# EAGLE board untitled (EAGLE 9.4.2), part 1 of 2
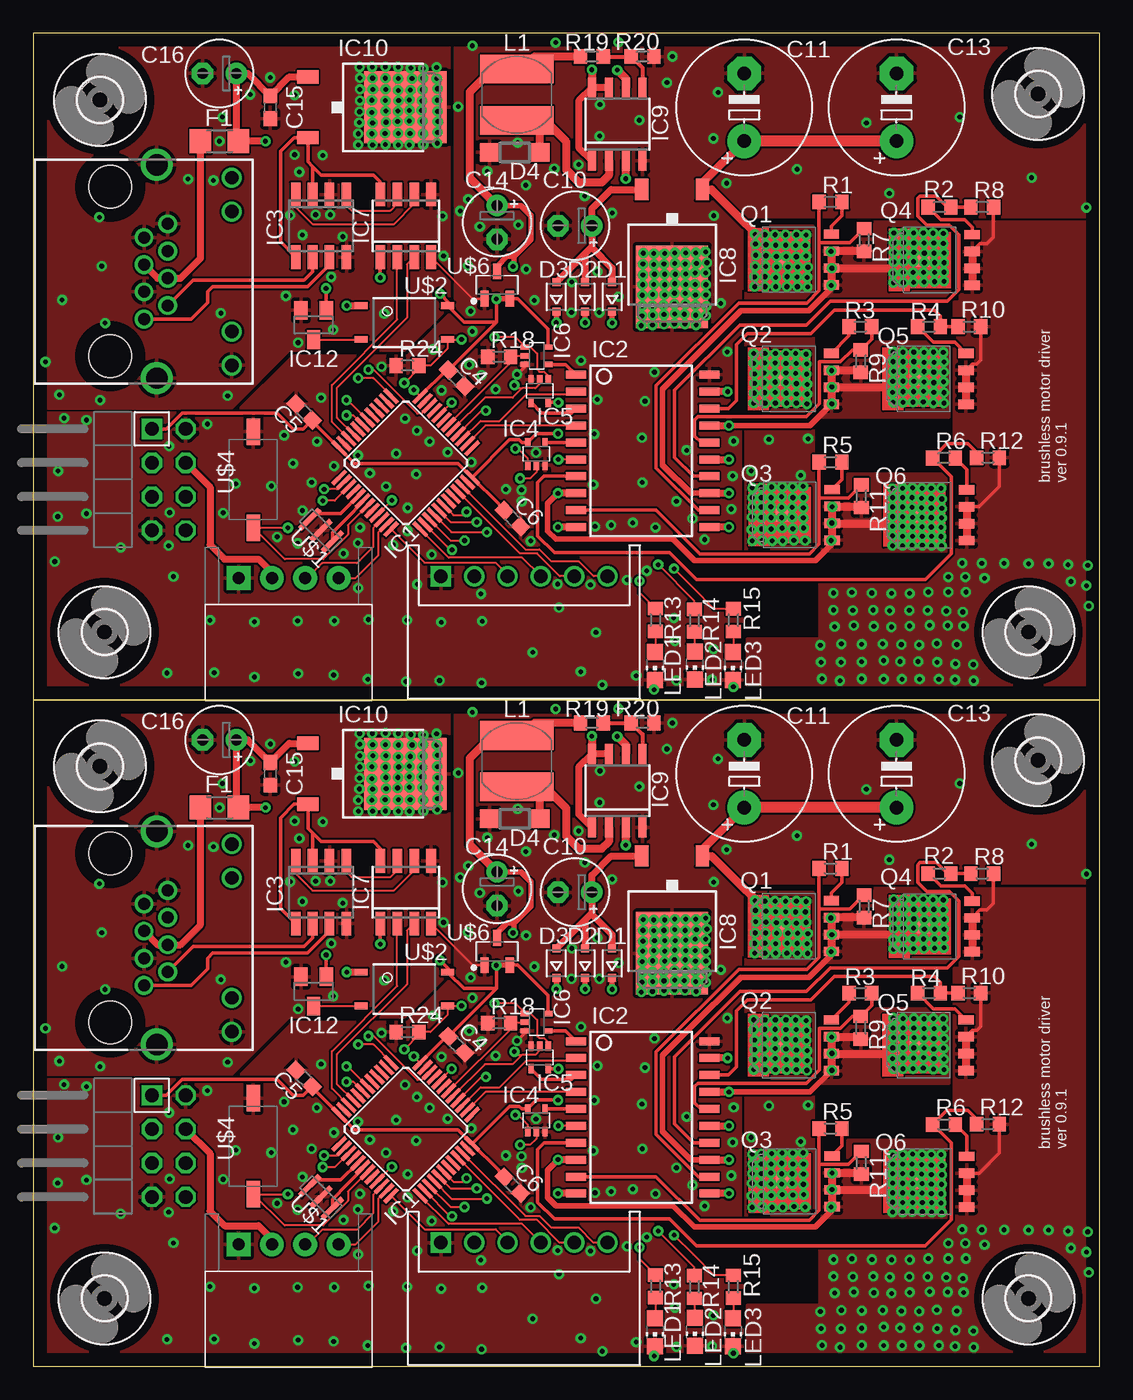
[diagram p0: board, top side]
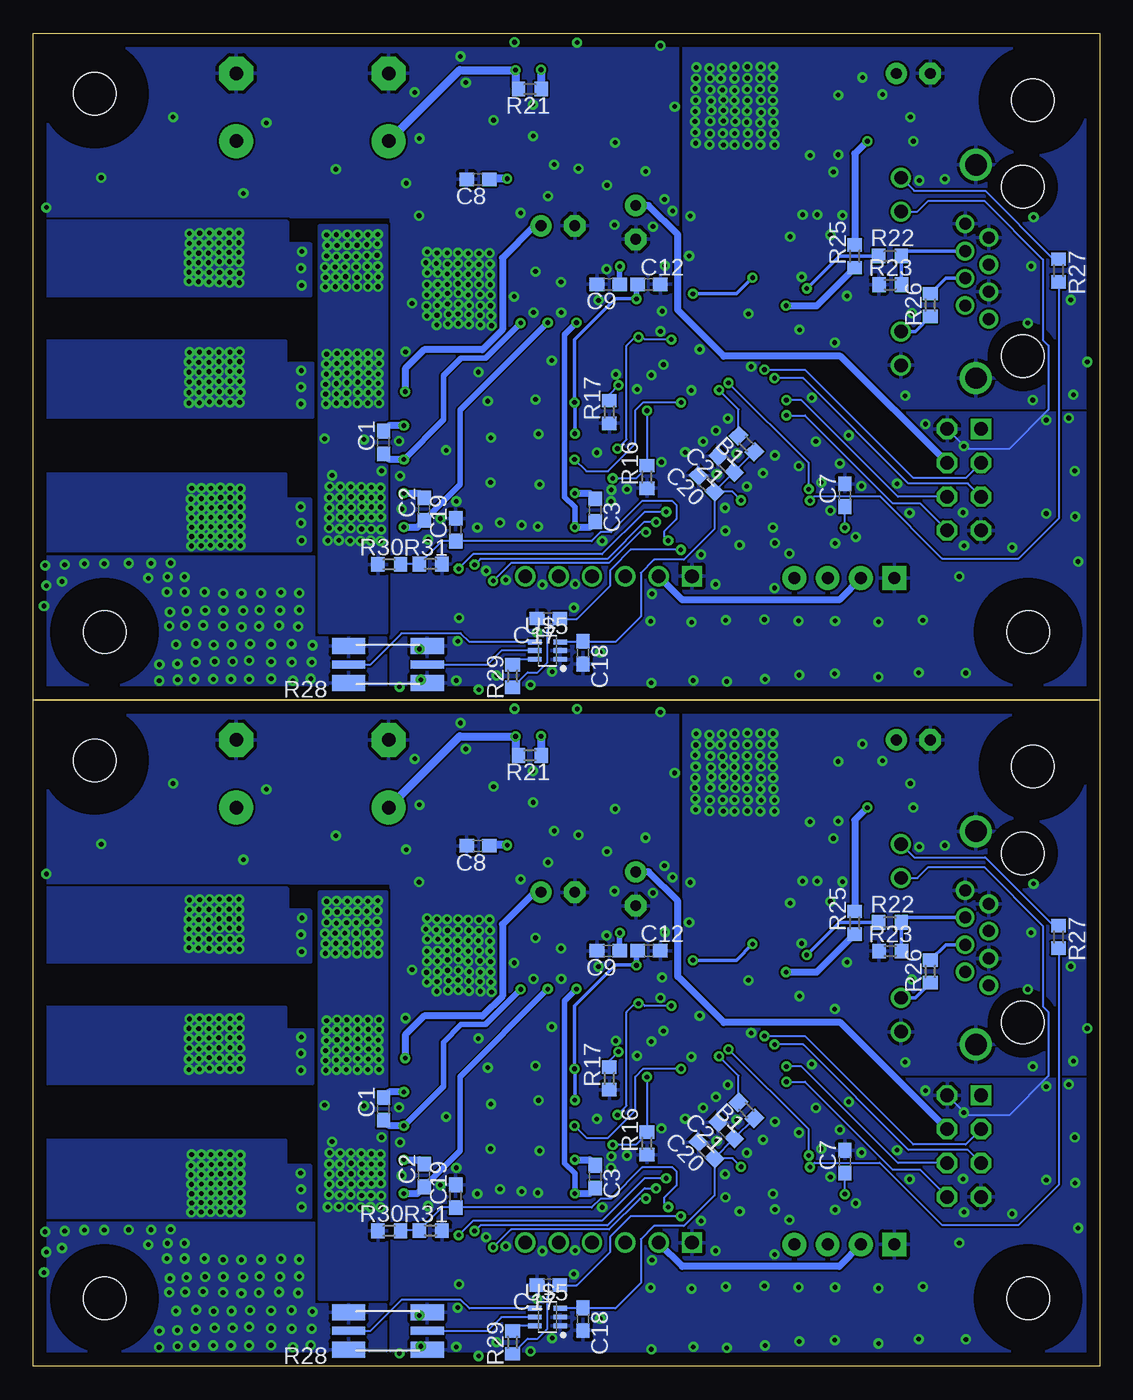
[diagram p1: board, bottom side, seen from below]

Size 80 x 100 mm. Coordinates in mm from the lower left corner, seen from the top.
Outline: 80,50 80,0 0,0 0,50
Outline: 80,50 0,50
Outline: 0,50 80,50
Outline: 80,50 80,100 0,100 0,50
Copper layers (1*16): Top 0.035mm / dielectric 1.5mm / Bottom 0.035mm
Design rules "default": minimum track width 6mil, minimum drill 0.35mm, track to track 6mil, track to pad 6mil, pad to pad 6mil, via to via 6mil, smd to smd 6mil, copper to edge 40mil, drill to drill 6mil, minimum pad ring 10mil, minimum via ring 8mil, stop-mask expansion 4mil, vias tented up to drill 0mil, thermal gap 10mil

## Footprints (pad centres in the part's own frame; a part is rotated, then mirrored left to right if it is on the bottom)
R0603 = smd 1 x 1.1: 1 -0.85,0; 2 0.85,0
C0603 = smd 1.1 x 1: 1 -0.85,0; 2 0.85,0
E2,5-5 = drill 0.813 pad 1.6: + -1.27,0 | drill 0.813 pad 1.6 octagon: - 1.27,0
E5-10,5 = drill 1.016 pad 2.54: + -2.54,0 | drill 1.016 pad 2.54 octagon: - 2.54,0
S6B-XH-A = drill 1.016 square: 1 6.25,0 | drill 1.016: 2 3.75,0; 3 1.25,0; 4 -1.25,0; 5 -3.75,0; 6 -6.25,0
SOD323-R = smd 0.6 x 0.6: A 1.1,0; C -1.1,0
SOD123 = smd 1.4 x 1.4: A 1.9,0; C -1.9,0
R1206 = smd 1.6 x 1.803: 1 -1.422,0; 2 1.422,0
3,2 = hole 3.2: 0,0
LQFP48 = smd 1.4 x 0.3: 1 -4.3,2.75; 2 -4.3,2.25; 3 -4.3,1.75; 4 -4.3,1.25; 5 -4.3,0.75; 6 -4.3,0.25; 7 -4.3,-0.25; 8 -4.3,-0.75; 9 -4.3,-1.25; 10 -4.3,-1.75; 11 -4.3,-2.25; 12 -4.3,-2.75; 25 4.3,-2.75; 26 4.3,-2.25; 27 4.3,-1.75; 28 4.3,-1.25; 29 4.3,-0.75; 30 4.3,-0.25; 31 4.3,0.25; 32 4.3,0.75; 33 4.3,1.25; 34 4.3,1.75; 35 4.3,2.25; 36 4.3,2.75 | smd 0.3 x 1.4: 13 -2.75,-4.3; 14 -2.25,-4.3; 15 -1.75,-4.3; 16 -1.25,-4.3; 17 -0.75,-4.3; 18 -0.25,-4.3; 19 0.25,-4.3; 20 0.75,-4.3; 21 1.25,-4.3; 22 1.75,-4.3; 23 2.25,-4.3; 24 2.75,-4.3; 37 2.75,4.3; 38 2.25,4.3; 39 1.75,4.3; 40 1.25,4.3; 41 0.75,4.3; 42 0.25,4.3; 43 -0.25,4.3; 44 -0.75,4.3; 45 -1.25,4.3; 46 -1.75,4.3; 47 -2.25,4.3; 48 -2.75,4.3
SOIC20S = smd 0.6 x 1.5: 1 -5.715,-5; 2 -4.445,-5; 3 -3.175,-5; 4 -1.905,-5; 5 -0.635,-5; 6 0.635,-5; 7 1.905,-5; 8 3.175,-5; 9 4.445,-5; 10 5.715,-5; 11 5.715,5; 12 4.445,5; 13 3.175,5; 14 1.905,5; 15 0.635,5; 16 -0.635,5; 17 -1.905,5; 18 -3.175,5; 19 -4.445,5; 20 -5.715,5
SO08 = smd 0.72 x 1.78: 1 -1.905,-2.35; 2 -0.635,-2.35; 3 0.635,-2.35; 4 1.905,-2.35; 5 1.905,2.35; 6 0.635,2.35; 7 -0.635,2.35; 8 -1.905,2.35
SC70-5 = smd 0.4 x 0.7: 1 -0.65,-0.85; 2 0,-0.85; 3 0.65,-0.85; 4 0.65,0.85; 5 -0.65,0.85
TO252 = smd 1 x 1.6: 1 -2.28,-4.8; 2 2.28,-4.8 | smd 5.4 x 6.2: 3 0,2.5
SOIC8 = smd 0.6 x 1.5: 1 -1.905,-2.75; 2 -0.635,-2.75; 3 0.635,-2.75; 4 1.905,-2.75; 5 1.905,2.75; 6 0.635,2.75; 7 -0.635,2.75; 8 -1.905,2.75
SOT23 = smd 1 x 1.4: 1 -0.95,-1.1; 2 0.95,-1.1; 3 0,1.1
L5852 = smd 2.15 x 5.5: P$1 1.925,0; P$2 -1.925,0
CHIP-LED0805 = smd 1.2 x 1.2: A 0,-1.05; C 0,1.05
SOT669 = smd 1.15 x 0.7: 1 -2.725,1.905; 2 -2.725,0.635; 3 -2.725,-0.635; 4 -2.725,-1.905 | smd 1 x 1: 5 1,0
CSS2H-2512 = smd 2.5 x 1.2: 1$1 -2.95,1.4; 1$2 -2.95,-1.4; 2$1 2.95,1.4; 2$2 2.95,-1.4 | smd 2.5 x 0.6: 1S -2.95,0; 2S 2.95,0
CSTCE8M00G55 = smd 0.4 x 2.1: 1 -1.2,0; 2 0,0; 3 1.2,0
11-4M1S = smd 1 x 0.5: 1 -3.24,1.27; 2 -3.24,-1.27; 3 3.24,-1.27; 4 3.24,1.27
CON-XH-4-SIDE = drill 0.9 pad 1.778 square: P$1 10,2.3 | drill 0.9 pad 1.778: P$2 7.5,2.3; P$3 5,2.3; P$4 2.5,2.3
SWITCH_TACTILE_3X6 = smd 2 x 1: P$1 -3.6,0; P$2 3.6,0
SOT65P210X110-6 = smd 1.02 x 0.36: 1 -0.955,0.65; 2 -0.955,0; 3 -0.955,-0.65; 4 0.955,-0.65; 5 0.955,0; 6 0.955,0.65
SOT95P240X110-3 = smd 1.18 x 0.609: 1 -1.024,0.95; 2 -1.024,-0.95; 3 1.024,0
MA04-2W = drill 1.016 octagon: 1 -3.81,-1.27; 2 -3.81,1.27; 3 -1.27,-1.27; 4 -1.27,1.27; 5 1.27,-1.27; 6 1.27,1.27; 7 3.81,-1.27 | drill 1.016 square: 8 3.81,1.27
8P8C-LED = drill 0.9 pad 1.3: 1 3.57,-3.81; 2 2.55,-2.03; 3 1.53,-3.81; 4 0.51,-2.03; 5 -0.51,-3.81; 6 -1.53,-2.03; 7 -2.55,-3.81; 8 -3.57,-2.03 | drill 1 pad 1.422: GA 4.5,2.78; GC 7.04,2.78; YA -7.04,2.78; YC -4.5,2.78 | drill 1.6 pad 2.184: M1 -8,-2.85; M2 8,-2.85 | hole 3.2: 6.35,-6.35; -6.35,-6.35

## Placement (x,y rotation side)
B1  FERRITE_BEAD  [R0603]  26.49,19.2 135 bottom
B2  FERRITE_BEAD  [R0603]  26.49,69.2 135 bottom
C1  [C0603]  53.72,19.3 90 bottom
C2  [C0603]  50.67,14.3 90 bottom
C3  [C0603]  37.85,14.22 270 bottom
C4  100n  [C0603]  31.75,24.13 315 top
C5  100n  [C0603]  20.32,21.59 135 top
C6  100n  [C0603]  35.94,13.59 315 top
C7  100n  [C0603]  19.1,15.34 90 bottom
C8  [C0603]  46.63,39.04 180 bottom
C9  100n  [C0603]  36.86,31.17 180 bottom
C10  [E2,5-5]  40.64,35.56 180 top
C11  [E5-10,5]  53.34,44.45 90 top
C12  100n  [C0603]  33.81,31.17 0 bottom
C13  [E5-10,5]  64.77,44.45 90 top
C14  [E2,5-5]  34.8,35.81 270 top
C15  100n  [C0603]  17.78,44.45 270 top
C16  [E2,5-5]  13.97,46.99 180 top
C17  [C0603]  41.35,6.1 180 bottom
C18  [C0603]  38.76,3.53 270 bottom
C19  [C0603]  48.31,12.75 90 bottom
C20  10u  [C0603]  29.49,16.21 135 bottom
C21  1u  [C0603]  28.02,17.68 135 bottom
C22  [C0603]  53.72,69.3 90 bottom
C23  [C0603]  50.67,64.3 90 bottom
C24  [C0603]  37.85,64.22 270 bottom
C25  100n  [C0603]  31.75,74.13 315 top
C26  100n  [C0603]  20.32,71.59 135 top
C27  100n  [C0603]  35.94,63.59 315 top
C28  100n  [C0603]  19.1,65.34 90 bottom
C29  [C0603]  46.63,89.04 180 bottom
C30  100n  [C0603]  36.86,81.17 180 bottom
C31  100n  [C0603]  33.81,81.17 0 bottom
C32  [E5-10,5]  53.34,94.45 90 top
C33  [E5-10,5]  64.77,94.45 90 top
C34  [E2,5-5]  34.8,85.81 270 top
C35  [E2,5-5]  40.64,85.56 180 top
C36  100n  [C0603]  17.78,94.45 270 top
C37  [E2,5-5]  13.97,96.99 180 top
C38  [C0603]  41.35,56.1 180 bottom
C39  [C0603]  38.76,53.53 270 bottom
C40  [C0603]  48.31,62.75 90 bottom
C41  10u  [C0603]  29.49,66.21 135 bottom
C42  1u  [C0603]  28.02,67.68 135 bottom
CN1  [S6B-XH-A]  36.83,9.27 180 top
CN2  [S6B-XH-A]  36.83,59.27 180 top
D1  [SOD323-R]  43.43,30.23 90 top
D2  [SOD323-R]  41.4,30.23 90 top
D3  [SOD323-R]  39.24,30.23 90 top
D4  [SOD123]  36.12,41.07 180 top
D5  [SOD323-R]  43.43,80.23 90 top
D6  [SOD323-R]  41.4,80.23 90 top
D7  [SOD323-R]  39.24,80.23 90 top
D8  [SOD123]  36.12,91.07 180 top
F1  [R1206]  13.97,41.91 180 top
F2  [R1206]  13.97,91.91 180 top
H1  MOUNT-HOLE3.2  [3,2]  5,45 0 top
H2  MOUNT-HOLE3.2  [3,2]  75.39,45.45 0 top
H3  MOUNT-HOLE3.2  [3,2]  5.35,5.08 0 top
H4  MOUNT-HOLE3.2  [3,2]  74.66,5.08 0 top
H5  MOUNT-HOLE3.2  [3,2]  75.39,95.45 0 top
H6  MOUNT-HOLE3.2  [3,2]  5.35,55.08 0 top
H7  MOUNT-HOLE3.2  [3,2]  74.66,55.08 0 top
H8  MOUNT-HOLE3.2  [3,2]  5,95 0 top
IC1  STM32F103C8  [LQFP48]  27.94,17.78 45 top
IC2  [SOIC20S]  45.72,18.67 270 top
IC3  NCV7351D1E  [SO08]  21.59,35.56 180 top
IC4  74AHCT1G08DCK  [SC70-5]  37.74,18.44 0 top
IC5  74AHCT1G08DCK  [SC70-5]  38,23.16 180 top
IC6  74AHCT1G08DCK  [SC70-5]  37.77,25.81 270 top
IC7  SI8621AB-B-IS  [SO08]  27.94,35.56 0 top
IC8  7815DT  [TO252]  47.93,33.48 180 top
IC9  MC34063AD  [SOIC8]  43.81,43.18 0 top
IC10  7805DT  [TO252]  25.4,44.45 270 top
IC11  STM32F103C8  [LQFP48]  27.94,67.78 45 top
IC12  BSS138BK  [SOT23]  21.03,28.12 180 top
IC13  [SOIC20S]  45.72,68.67 270 top
IC14  NCV7351D1E  [SO08]  21.59,85.56 180 top
IC15  SI8621AB-B-IS  [SO08]  27.94,85.56 0 top
IC16  7815DT  [TO252]  47.93,83.48 180 top
IC17  7805DT  [TO252]  25.4,94.45 270 top
IC18  MC34063AD  [SOIC8]  43.81,93.18 0 top
IC19  BSS138BK  [SOT23]  21.03,78.12 180 top
IC20  74AHCT1G08DCK  [SC70-5]  37.74,68.44 0 top
IC21  74AHCT1G08DCK  [SC70-5]  38,73.16 180 top
IC22  74AHCT1G08DCK  [SC70-5]  37.77,75.81 270 top
L1  L5852  [L5852]  36.27,45.39 270 top
L2  L5852  [L5852]  36.27,95.39 270 top
LED1  [CHIP-LED0805]  46.66,2.54 180 top
LED2  [CHIP-LED0805]  49.63,2.57 180 top
LED3  [CHIP-LED0805]  52.5,2.54 180 top
LED4  [CHIP-LED0805]  46.66,52.54 180 top
LED5  [CHIP-LED0805]  49.63,52.57 180 top
LED6  [CHIP-LED0805]  52.5,52.54 180 top
Q1  N-MOSFET-  [SOT669]  57.15,33.02 180 top
Q2  N-MOSFET-  [SOT669]  57.15,24.08 180 top
Q3  N-MOSFET-  [SOT669]  57.2,13.87 180 top
Q4  N-MOSFET-  [SOT669]  67.72,32.99 180 top
Q5  N-MOSFET-  [SOT669]  67.26,24.08 180 top
Q6  N-MOSFET-  [SOT669]  67.31,13.84 180 top
Q7  N-MOSFET-  [SOT669]  57.15,83.02 180 top
Q8  N-MOSFET-  [SOT669]  57.15,74.08 180 top
Q9  N-MOSFET-  [SOT669]  57.2,63.87 180 top
Q10  N-MOSFET-  [SOT669]  67.72,82.99 180 top
Q11  N-MOSFET-  [SOT669]  67.26,74.08 180 top
Q12  N-MOSFET-  [SOT669]  67.31,63.84 180 top
R1  10  [R0603]  59.82,37.34 0 top
R2  10  [R0603]  68,36.96 180 top
R3  10  [R0603]  62.05,27.99 180 top
R4  10  [R0603]  67.21,27.99 180 top
R5  10  [R0603]  59.82,17.83 0 top
R6  10  [R0603]  68.33,18.14 0 top
R7  10k  [R0603]  62.33,34.49 270 top
R8  10k  [R0603]  71.2,36.96 0 top
R9  10k  [R0603]  62.08,25.4 270 top
R10  10k  [R0603]  70.23,27.99 0 top
R11  10k  [R0603]  62.13,15.27 270 top
R12  10k  [R0603]  71.63,18.16 0 top
R13  1k  [R0603]  46.69,5.99 270 top
R14  1k  [R0603]  49.61,5.94 270 top
R15  1k  [R0603]  52.53,5.97 270 top
R16  1k  [R0603]  33.96,16.71 90 bottom
R17  1k  [R0603]  36.78,21.59 90 bottom
R18  1k  [R0603]  34.95,25.73 0 top
R19  [R0603]  41.91,48.26 180 top
R20  [R0603]  45.72,48.26 180 top
R21  [R0603]  42.75,45.82 180 bottom
R22  1k  [R0603]  15.72,33.3 0 bottom
R23  100k  [R0603]  15.7,31.14 0 bottom
R24  1k  [R0603]  28.07,25.07 0 top
R25  1k?  [R0603]  18.36,33.27 90 bottom
R26  4k7  [R0603]  12.7,29.62 90 bottom
R27  470  [R0603]  3.07,32.21 270 bottom
R28  CSS2H-2512  [CSS2H-2512]  53.39,2.64 180 bottom
R29  10  [R0603]  44.04,1.78 270 bottom
R30  10  [R0603]  53.29,10.16 180 bottom
R31  10  [R0603]  50.19,10.19 180 bottom
R32  10  [R0603]  59.82,87.34 0 top
R33  10k  [R0603]  70.23,77.99 0 top
R34  10k  [R0603]  62.13,65.27 270 top
R35  10k  [R0603]  71.63,68.16 0 top
R36  1k  [R0603]  46.69,55.99 270 top
R37  1k  [R0603]  49.61,55.94 270 top
R38  1k  [R0603]  52.53,55.97 270 top
R39  10  [R0603]  68,86.96 180 top
R40  10  [R0603]  62.05,77.99 180 top
R41  10  [R0603]  67.21,77.99 180 top
R42  10  [R0603]  59.82,67.83 0 top
R43  10  [R0603]  68.33,68.14 0 top
R44  10k  [R0603]  62.33,84.49 270 top
R45  10k  [R0603]  71.2,86.96 0 top
R46  10k  [R0603]  62.08,75.4 270 top
R47  1k  [R0603]  33.96,66.71 90 bottom
R48  1k  [R0603]  36.78,71.59 90 bottom
R49  1k  [R0603]  34.95,75.73 0 top
R50  [R0603]  41.91,98.26 180 top
R51  [R0603]  45.72,98.26 180 top
R52  [R0603]  42.75,95.82 180 bottom
R53  1k  [R0603]  15.72,83.3 0 bottom
R54  100k  [R0603]  15.7,81.14 0 bottom
R55  1k  [R0603]  28.07,75.07 0 top
R56  1k?  [R0603]  18.36,83.27 90 bottom
R57  4k7  [R0603]  12.7,79.62 90 bottom
R58  470  [R0603]  3.07,82.21 270 bottom
R59  CSS2H-2512  [CSS2H-2512]  53.39,52.64 180 bottom
R60  10  [R0603]  44.04,51.78 270 bottom
R61  10  [R0603]  53.29,60.16 180 bottom
R62  10  [R0603]  50.19,60.19 180 bottom
U$1  CSTCE8M00G55  [CSTCE8M00G55]  21.59,12.7 315 top
U$2  TLP184  [11-4M1S]  27.84,28.3 0 top
U$3  XH-4-SIDE  [CON-XH-4-SIDE]  25.4,11.43 180 top
U$4  SWITCH_TACTILETOP  [SWITCH_TACTILE_3X6]  16.51,16.51 270 top
U$5  NCS199  [SOT65P210X110-6]  41.43,3.68 180 bottom
U$6  XC6206  [SOT95P240X110-3]  34.8,31.11 90 top
U$7  CSTCE8M00G55  [CSTCE8M00G55]  21.59,62.7 315 top
U$8  MA04-2  [MA04-2W]  10.16,16.51 90 top
U$9  TLP184  [11-4M1S]  27.84,78.3 0 top
U$10  XH-4-SIDE  [CON-XH-4-SIDE]  25.4,61.43 180 top
U$11  SWITCH_TACTILETOP  [SWITCH_TACTILE_3X6]  16.51,66.51 270 top
U$12  XC6206  [SOT95P240X110-3]  34.8,81.11 90 top
U$13  MA04-2  [MA04-2W]  10.16,66.51 90 top
U$14  NCS199  [SOT65P210X110-6]  41.43,53.68 180 bottom
X1  8P8C-LED  [8P8C-LED]  12.12,32.13 270 top
X2  8P8C-LED  [8P8C-LED]  12.12,82.13 270 top

## Library data of the parts
B1 B2 D4 D8 IC2 IC4-IC10 IC13 IC15-IC18 IC20-IC22 L1 L2 LED1-LED6 Q1-Q12 R1-R62 U$2 U$5 U$8 U$9 U$13 U$14 = mylib
C1-C7 C10 C11 C13 C14 C16-C28 C32-C35 C37-C42 = rcl; SPICEPREFIX: C
C8 C9 C12 C15 C29-C31 C36 = mylib; SPICEPREFIX: C
CN1 CN2 = jst-xh
D1-D3 D5-D7 = diode
F1 F2 = mylib; SPICEPREFIX: R
H1-H8 = holes
IC1 IC11 = stm32_mcu
IC3 IC14 = on-semi
IC12 IC19 = mylib; MF: MAXIM; MPN: MAX6520EUR-T; OC_FARNELL: unknown; OC_NEWARK: 02J4586
U$1 U$7 = resonator
U$3 U$10 = con-xh
U$4 U$11 = switch-tactile
U$6 U$12 = torex
X1 X2 = mylib; OC_FARNELL: unknown; OC_NEWARK: unknown

## Nets
3V3A: B1.1 C18.1 C20.1 C21.1 IC1.9 U$5.3
3V3A1: B2.1 C39.1 C41.1 C42.1 IC11.9 U$14.3
5V_ISO: IC3.3 IC3.5 IC7.8 IC10.2
5V_ISO1: IC14.3 IC14.5 IC15.8 IC17.2
24V_ISO: C15.1 C16.+ F1.1 IC10.1 R25.2
24V_ISO1: C36.1 C37.+ F2.1 IC17.1 R56.2
!EMS: IC1.2 IC4.1 IC5.1 IC6.1 R24.2 U$2.3
!EMS1: IC11.2 IC20.1 IC21.1 IC22.1 R55.2 U$9.3
!RESET: C7.1 IC1.7 U$4.P$2
!RESET1: C28.1 IC11.7 U$11.P$2
+3V1: B2.2 C25.1 C26.1 C27.1 C31.1 IC11.24 IC11.36 IC11.48 IC15.1 IC20.5 IC21.5 IC22.5 U$9.4 U$12.2 U$13.8
+3V3: B1.2 C4.1 C5.1 C6.1 C12.1 IC1.24 IC1.36 IC1.48 IC4.5 IC5.5 IC6.5 IC7.1 U$2.4 U$6.2 U$8.8
+5V: C9.1 C14.+ CN1.2 L1.P$2 R19.2 U$3.P$2 U$6.3 U$8.5
+5V1: C30.1 C34.+ CN2.2 L2.P$2 R50.2 U$10.P$2 U$12.3 U$13.5
+15V: C10.+ D1.A D2.A D3.A IC2.19 IC8.2
+15V1: C35.+ D5.A D6.A D7.A IC13.19 IC16.2
CANRX: IC1.45 IC7.3
CANRX1: IC11.45 IC15.3
CANTX: IC1.46 IC7.2
CANTX1: IC11.46 IC15.2
ENC_A: IC1.10 U$3.P$3
ENC_A1: IC11.10 U$10.P$3
ENC_B: IC1.11 U$3.P$4
ENC_B1: IC11.11 U$10.P$4
GNDA: C4.2 C5.2 C6.2 C7.2 C8.2 C9.2 C10.- C11.- C12.2 C13.- C14.- C17.2 C18.2 C19.2 C20.2 C21.2 CN1.1 D4.A IC1.8 IC1.23 IC1.35 IC1.44 IC1.47 IC2.20 IC4.3 IC5.3 IC6.3 IC7.4 IC8.3 IC9.4 LED1.C LED2.C LED3.C R16.1 R17.1 R18.1 R20.1 R24.1 R28.1$1 R28.1$2 R31.1 U$1.2 U$3.P$1 U$4.P$1 U$5.1 U$5.2 U$6.1 U$8.2 U$8.7 X1.YC
GNDA1: C25.2 C26.2 C27.2 C28.2 C29.2 C30.2 C31.2 C32.- C33.- C34.- C35.- C38.2 C39.2 C40.2 C41.2 C42.2 CN2.1 D8.A IC11.8 IC11.23 IC11.35 IC11.44 IC11.47 IC13.20 IC15.4 IC16.3 IC18.4 IC20.3 IC21.3 IC22.3 LED4.C LED5.C LED6.C R47.1 R48.1 R49.1 R51.1 R55.1 R59.1$1 R59.1$2 R62.1 U$7.2 U$10.P$1 U$11.P$1 U$12.1 U$13.2 U$13.7 U$14.1 U$14.2 X2.YC
GNDIO: C15.2 C16.- IC3.2 IC3.8 IC7.5 IC10.3 IC12.2 R23.1 X1.3 X1.7 X1.8 X1.GC X1.M1 X1.M2
GNDIO1: C36.2 C37.- IC14.2 IC14.8 IC15.5 IC17.3 IC19.2 R54.1 X2.3 X2.7 X2.8 X2.GC X2.M1 X2.M2
HIN1: IC2.1 IC6.4
HIN2: IC2.3 IC5.4
HIN3: IC2.5 IC4.4
HIN4: IC13.5 IC20.4
HIN5: IC13.3 IC21.4
HIN6: IC13.1 IC22.4
HO1: IC2.12 R1.1 R7.1
HO2: IC2.16 R3.1 R9.1
HO3: IC2.9 R5.1 R11.1
HO4: IC13.12 R32.1 R44.1
HO5: IC13.16 R40.1 R46.1
HO6: IC13.9 R34.1 R42.1
IN_A: CN1.3 IC1.12
IN_A1: CN2.3 IC11.12
IN_B: CN1.4 IC1.13
IN_B1: CN2.4 IC11.13
IN_C: CN1.5 IC1.21
IN_C1: CN2.5 IC11.21
IN_D: CN1.6 IC1.22
IN_D1: CN2.6 IC11.22
ISENSE: C17.1 IC1.14 R29.2
ISENSE1: C38.1 IC11.14 R60.2
LED0: IC1.16 R13.1
LED1: IC1.17 R14.1
LED2: IC1.18 R15.1
LED3: IC11.16 R36.1
LED4: IC11.17 R37.1
LED5: IC11.18 R38.1
LED_CAN: IC1.3 R27.2
LED_CAN1: IC11.3 R58.2
LIN1: IC1.27 IC2.2
LIN2: IC1.26 IC2.4
LIN3: IC1.32 IC2.6
LIN4: IC11.27 IC13.2
LIN5: IC11.32 IC13.6
LIN6: IC11.26 IC13.4
LO1: IC2.14 R2.1 R8.1
LO2: IC2.18 R4.1 R10.1
LO3: IC2.7 R6.1 R12.1
LO4: IC13.14 R39.1 R45.1
LO5: IC13.18 R33.1 R41.1
LO6: IC13.7 R35.1 R43.1
N$1: IC1.6 U$1.3
N$2: IC1.5 U$1.1
N$3: IC1.30 IC6.2 R18.2
N$4: IC3.1 IC7.7
N$5: IC1.28 IC4.2 R16.2
N$6: C1.1 D1.C IC2.15
N$7: IC3.7 X1.1
N$8: C2.1 D2.C IC2.11
N$9: C3.2 D3.C IC2.10
N$10: IC3.6 X1.2
N$11: IC1.29 IC5.2 R17.2
N$12: Q1.4 R1.2
N$13: Q4.4 R2.2
N$14: Q2.4 R3.2
N$15: Q5.4 R4.2
N$16: Q3.4 R5.2
N$17: Q6.4 R6.2
N$18: Q4.1 Q4.2 Q4.3 Q5.1 Q5.2 Q5.3 Q6.1 Q6.2 Q6.3 R8.2 R10.2 R12.2 R28.2$1 R28.2$2
N$19: R28.2S U$5.4
N$20: R28.1S U$5.5
N$21: IC3.4 IC7.6
N$22: R22.2 R23.2 X1.6
N$23: LED3.A R15.2
N$24: LED1.A R13.2
N$25: LED2.A R14.2
N$26: F1.2 R26.2 X1.4 X1.5
N$27: D4.C IC9.2 L1.P$1
N$28: IC9.5 R19.1 R20.2
N$29: IC9.1 IC9.7 IC9.8 R21.1
N$30: C8.1 IC9.3
N$31: IC12.1 R22.1
N$32: IC12.3 U$2.2
N$33: R25.1 U$2.1
N$34: IC11.6 U$7.3
N$35: IC11.5 U$7.1
N$36: R26.1 X1.GA
N$37: R29.1 U$5.6
N$38: R27.1 X1.YA
N$39: IC11.28 IC20.2 R47.2
N$40: LED6.A R38.2
N$41: LED4.A R36.2
N$42: LED5.A R37.2
N$43: Q7.4 R32.2
N$44: Q10.4 R39.2
N$45: Q8.4 R40.2
N$46: Q11.4 R41.2
N$47: Q9.4 R42.2
N$48: Q12.4 R43.2
N$49: C22.1 D5.C IC13.15
N$50: C23.1 D6.C IC13.11
N$51: C24.2 D7.C IC13.10
N$52: IC14.7 X2.1
N$53: IC14.6 X2.2
N$54: IC11.29 IC21.2 R48.2
N$55: IC11.30 IC22.2 R49.2
N$56: IC14.1 IC15.7
N$57: IC14.4 IC15.6
N$58: R53.2 R54.2 X2.6
N$59: F2.2 R57.2 X2.4 X2.5
N$60: D8.C IC18.2 L2.P$1
N$61: IC18.5 R50.1 R51.2
N$62: IC18.1 IC18.7 IC18.8 R52.1
N$63: C29.1 IC18.3
N$64: IC19.1 R53.1
N$65: IC19.3 U$9.2
N$66: R56.1 U$9.1
N$67: R57.1 X2.GA
N$68: R58.1 X2.YA
N$69: Q10.1 Q10.2 Q10.3 Q11.1 Q11.2 Q11.3 Q12.1 Q12.2 Q12.3 R33.2 R35.2 R45.2 R59.2$1 R59.2$2
N$70: R59.2S U$14.4
N$71: R59.1S U$14.5
N$72: R60.1 U$14.6
SWCLK: IC1.37 U$8.4
SWCLK1: IC11.37 U$13.4
SWDIO: IC1.34 U$8.6
SWDIO1: IC11.34 U$13.6
U: C2.2 IC2.13 Q1.1 Q1.2 Q1.3 Q4.5 R7.2
U1: C23.2 IC13.13 Q7.1 Q7.2 Q7.3 Q10.5 R44.2
UART_RX: IC1.43 U$8.1
UART_RX1: IC11.43 U$13.1
UART_TX: IC1.42 U$8.3
UART_TX1: IC11.42 U$13.3
V: C1.2 IC2.17 Q2.1 Q2.2 Q2.3 Q5.5 R9.2
V1: C22.2 IC13.17 Q8.1 Q8.2 Q8.3 Q11.5 R46.2
VCC: C11.+ C13.+ IC8.1 IC9.6 Q1.5 Q2.5 Q3.5 R21.2 R30.2
VCC1: C32.+ C33.+ IC16.1 IC18.6 Q7.5 Q8.5 Q9.5 R52.2 R61.2
VSENSE: C19.1 IC1.15 R30.1 R31.2
VSENSE1: C40.1 IC11.15 R61.1 R62.2
W: C3.1 IC2.8 Q3.1 Q3.2 Q3.3 Q6.5 R11.2
W1: C24.1 IC13.8 Q9.1 Q9.2 Q9.3 Q12.5 R34.2